# Altium PCB PICHeaderBoard.PcbDoc
Units mm, origin at the board's own origin, x right, y up, seen from the top; angles counter-clockwise.
Board outline 30.7 x 48.5 mm, 2 copper layers (Top Layer, Bottom Layer); 25 components, 44 nets, 141 pads, 39 vias.
Unrouted connection lines stored in the file: 2.
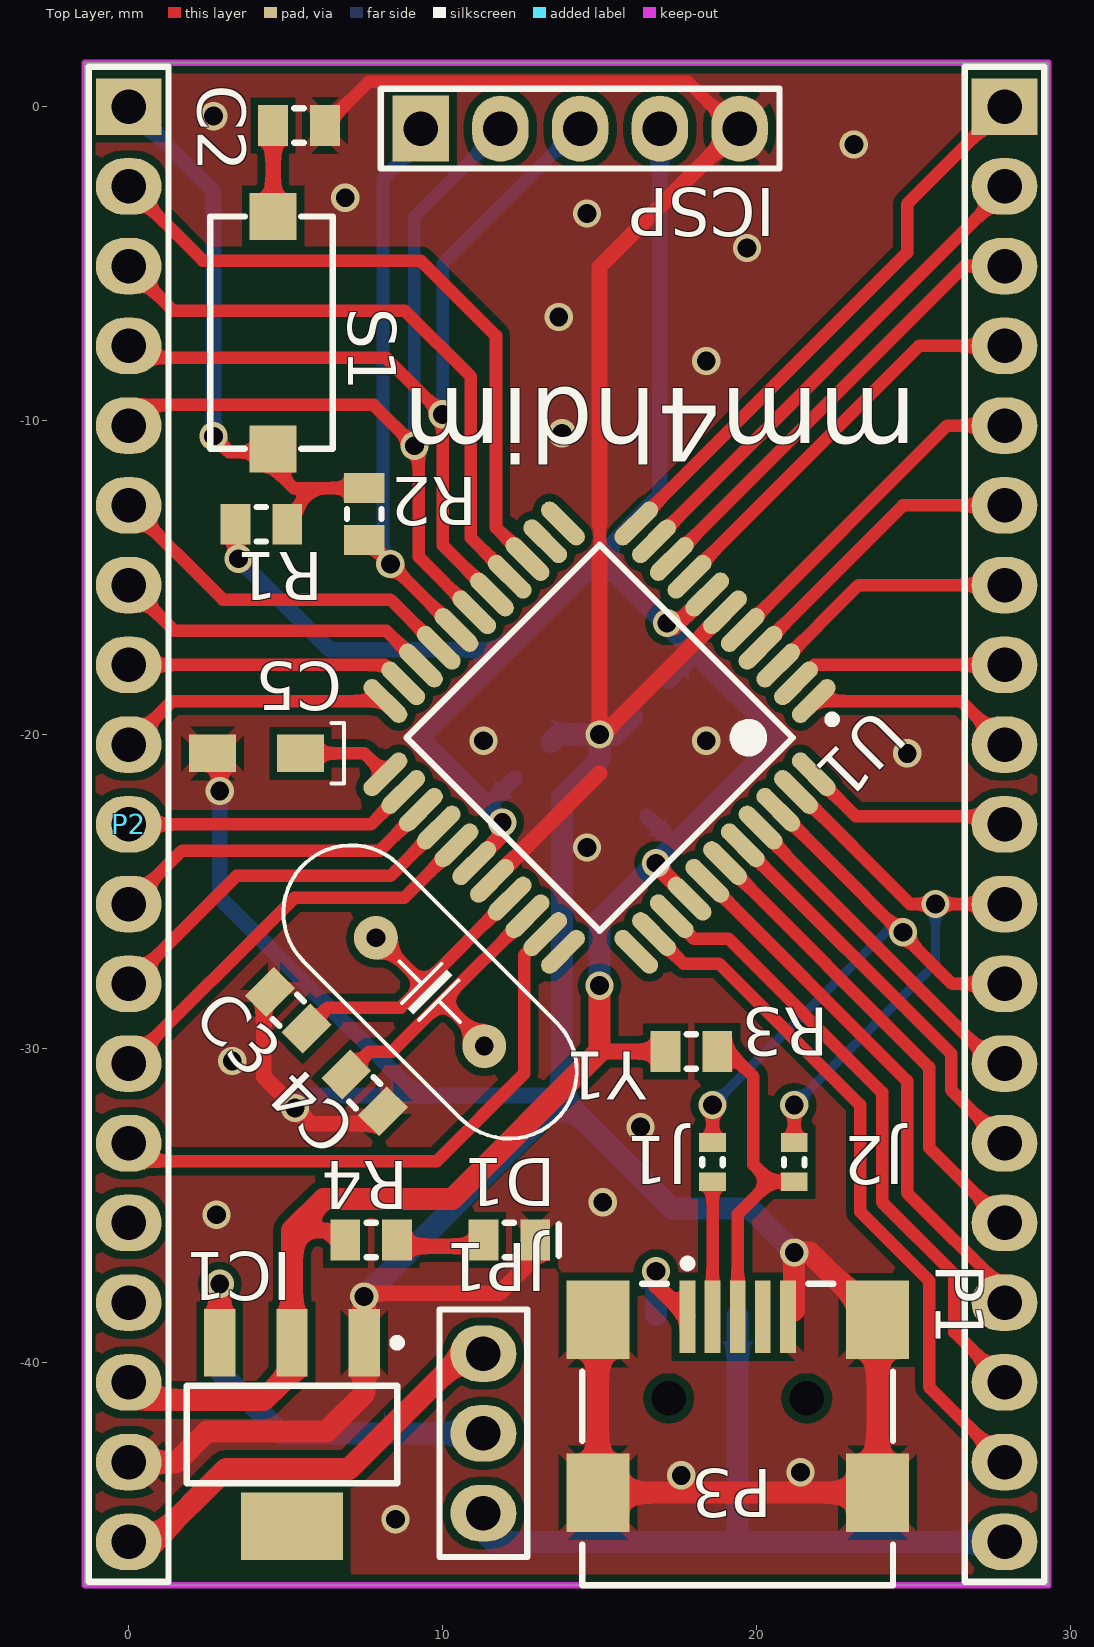
[diagram p0: Top Layer view]
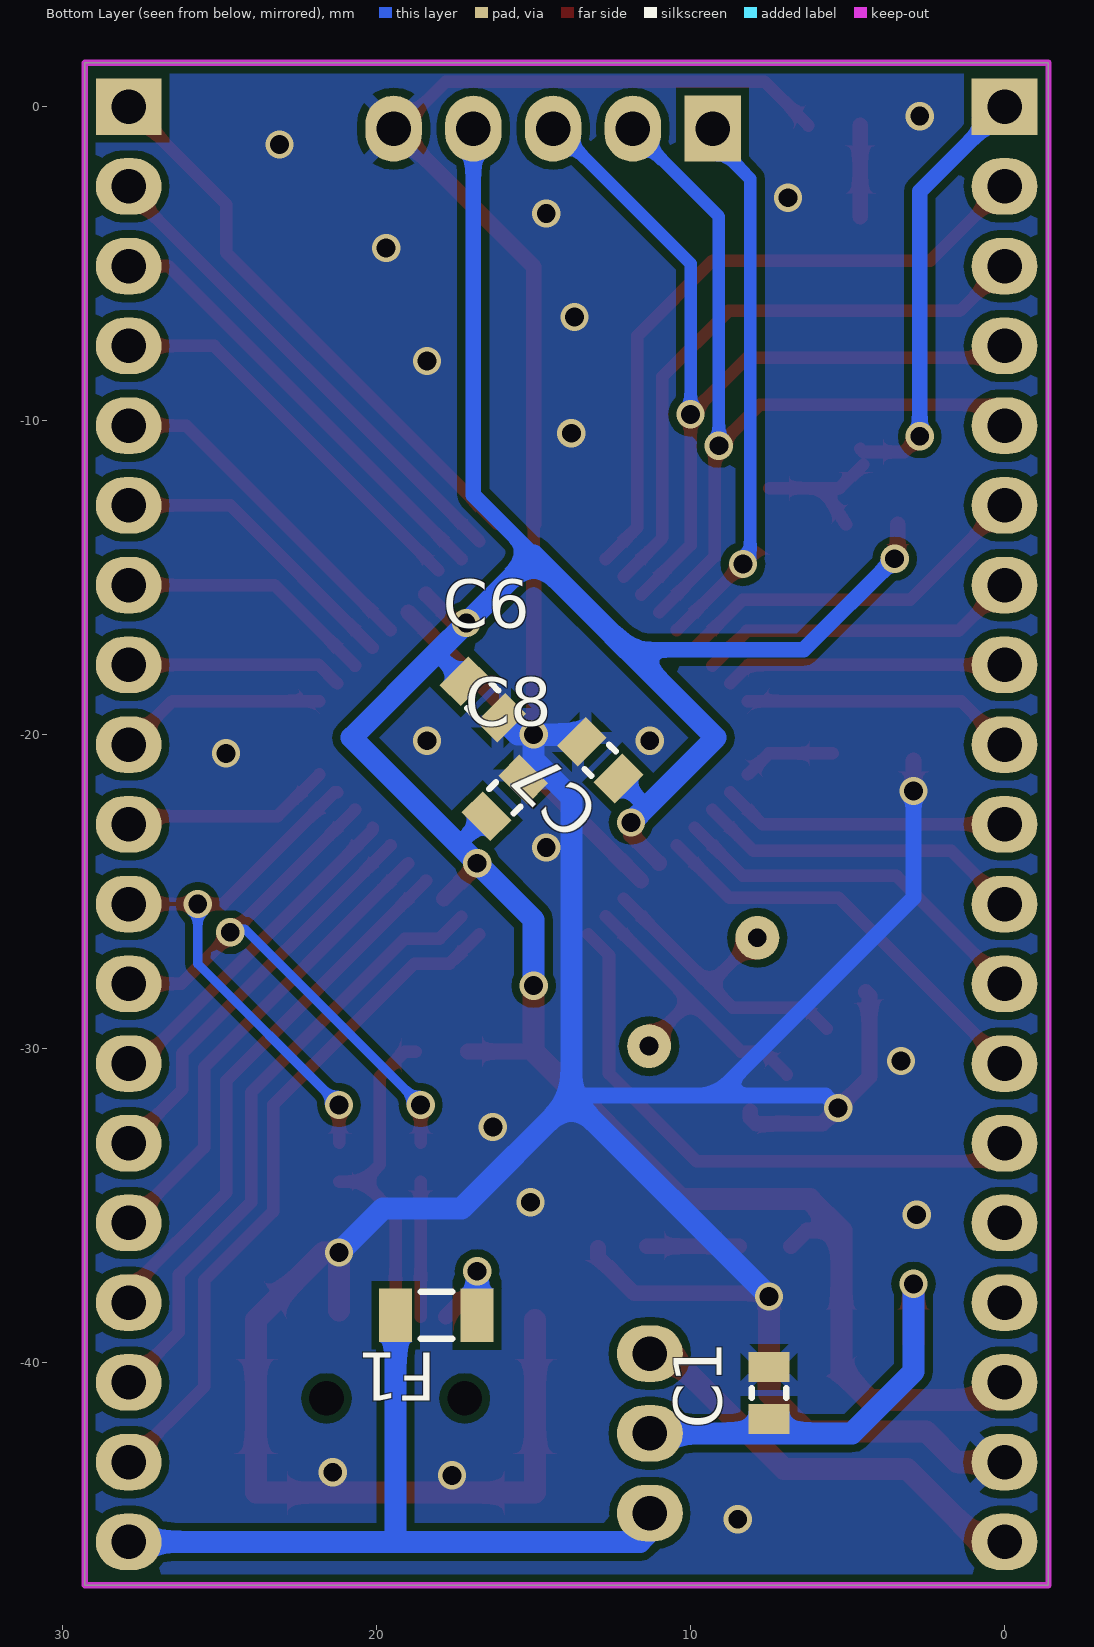
[diagram p1: Bottom Layer view, seen from below]
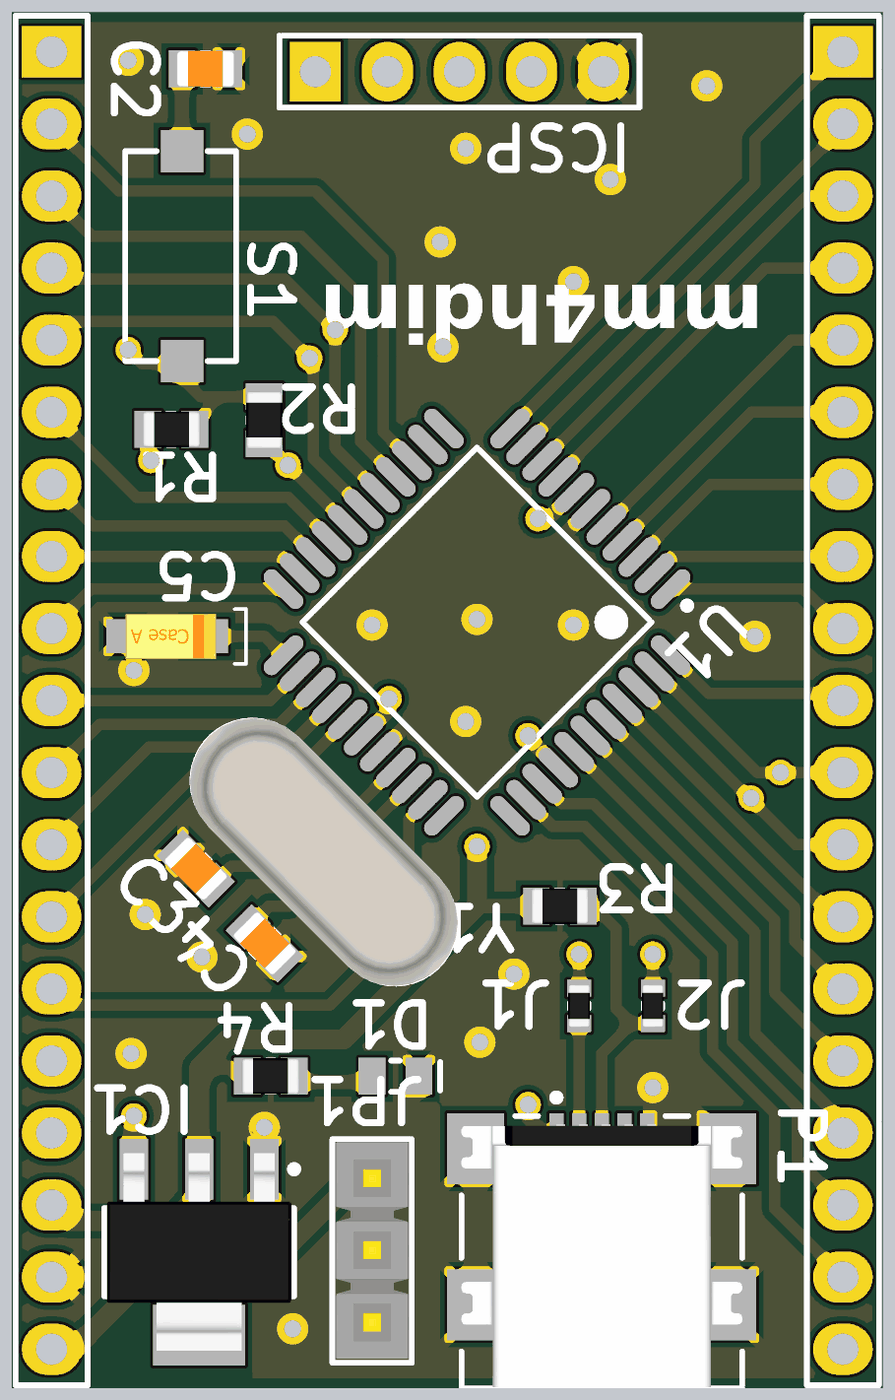
[diagram p2: 3D render of the assembled board from above, using the file's embedded part models]
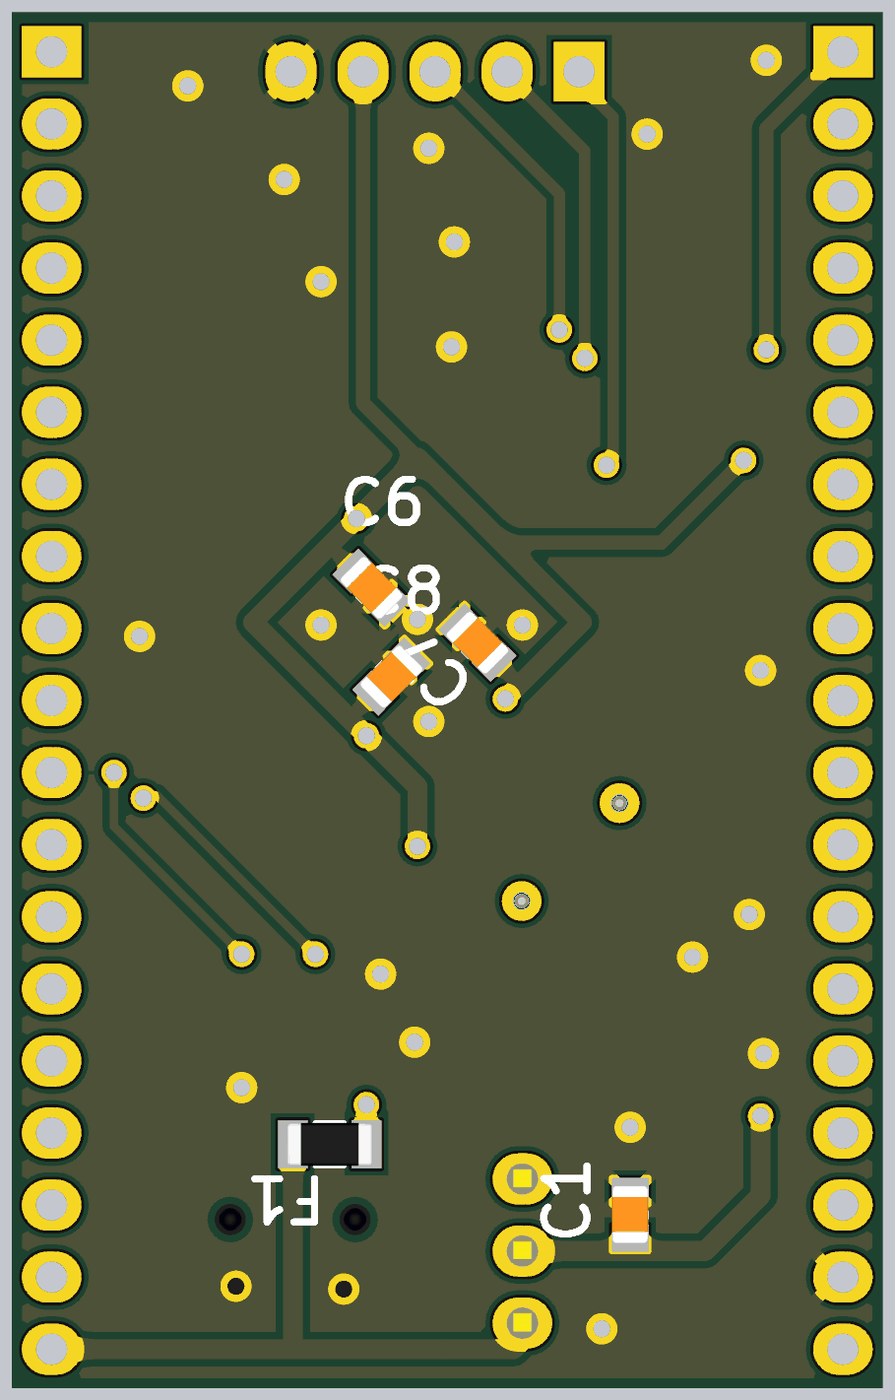
[diagram p3: 3D render of the assembled board from below, using the file's embedded part models]

## Layer stack, top to bottom
Top Solder: solder mask 0.0102, Solder Resist, Dk 3.5
Top Layer: signal copper 0.0356
Dielectric 1: dielectric 0.32, FR-4, Dk 4.8
Bottom Layer: signal copper 0.0356
Bottom Solder: solder mask 0.0102, Solder Resist, Dk 3.5

## Board outline
-1.4,-47.1 -1.4,1.4 29.3,1.4 29.3,-47.1

## Design rules (kind name [scope] priority, off if disabled: settings)
Clearance [All] p1: gap=0.25
ComponentClearance [All] p1: gap=0.2 collisioncheckmode=3 verticalgap=0.2 showdistances=FALSE
PlaneConnect [All] p1: planeconnectstyle=Relief reliefexpansion=0.508 reliefentries=4 reliefconductorwidth=1 reliefairgap=0.254
PolygonConnect PolygonConnect_1 [IsVia] p1: connectstyle=Direct reliefconductorwidth=0.254 reliefentries=4 polygonreliefangle="90 Angle" airgapwidth=0.254
PolygonConnect [All] p2: connectstyle=Relief reliefconductorwidth=0.4 reliefentries=4 polygonreliefangle="45 Angle" airgapwidth=0.25
RoutingVias [All] p1: holewidth=0.6 width=0.9 viastyle="Through Hole" minholewidth=0.5 minwidth=0.6 maxholewidth=0.711 maxwidth=1
SolderMaskExpansion [All] p1: expansion=0.102
Width [All] p1: maxlimit=1 minlimit=0.3 preferedwidth=0.7 minimp=50.000000 maximp=50.000000 favimp=50.000000
28 further rules are at their usual default settings.

## Components (designator, comment, footprint, x,y, rotation, side; value= is the part's Value field where it differs from the comment)
C1 "100nF" SMD_CAP_0805 7.5,-41.8 r90 bottom
C2 "100nF" SMD_CAP_0805 4.6,-0.6 r0 top
C3 "18pF" SMD_CAP_0805 4.5,-28.2 r315 top
C4 "18pF" SMD_CAP_0805 8.1,-32 r135 top
C5 "10uF" "TANTAL-CAP-Size A" 4.2,-20.6 r180 top
C6 "100nF" SMD_CAP_0805 17.2,-18.3 r225 bottom
C7 "100nF" SMD_CAP_0805 12.3,-21.4 r45 bottom
C8 "100nF" SMD_CAP_0805 16.5,-22.6 r135 bottom
D1 "LED" LED 12.1,-36.1 r270 top
F1 "500mA" SMD_RES_1206 16.8,-38.5 r0 bottom
IC1 "AMS1117" SOT223 5.2,-42.3 r180 top
ICSP "Header 5" HDR1X5 9.3,-0.7 r0 top
J1 "JUMPER" SMD_RES_0603 18.6,-33 r270 top
J2 "JEMPER" SMD_RES_0603 21.2,-33 r270 top
JP1 "Jumper Selector" "Jumper Selector" 11.3,-44.8 r90 top
P1 "USB mini" USB/SM0.8-6H5 19.4,-46.4 r270 top
P2 "Header 19" HDR1X19 0,0 r270 top
P3 "Header 19" HDR1X19 27.9,0 r270 top
R1 "10K" SMD_RES_0805 3.4,-13.3 r0 top
R2 "470" SMD_RES_0805 7.5,-13.8 r90 top
R3 "1.5K" SMD_RES_0805 17.1,-30.1 r0 top
R4 "470" SMD_RES_0805 6.9,-36.1 r0 top
S1 "Small Switch" "SMALL SWITCH" 4.6,-7.5 r90 top
U1 "PIC18F46J50-I/PT" TQFP-PT44_N 15,-20.1 r225 top
Y1 "16 MHz" "XTAL Small" 9.6,-28.2 r135 top

## Footprints (in the part's own frame and the unit in brackets; to place one, negate y for a bottom-side part, rotate by r counter-clockwise, add the part's x,y. Pads: shape width x height; smd on the part's side, far side on the other; paste and mask are expansions set on the pad)
HDR1X5 [mm] "Connector; Header; 5 Position"
  rect 1.8x2.1 hole 1.1: 1(0,0)
  oval 1.8x2.1 hole 1.1: 2(2.54,0) 3(5.08,0) 4(7.62,0) 5(10.16,0)
  silkscreen extent -1.27,-1.27 11.43,1.27
HDR1X19 [mm] "Connector; Header; 19 Position"
  rect 1.8x2.1 hole 1.1: 1(0,0)
  oval 1.8x2.1 hole 1.1: 2(2.54,0) 3(5.08,0) 4(7.62,0) 5(10.16,0) 6(12.7,0) 7(15.24,0) 8(17.78,0) 9(20.32,0) 10(22.86,0) 11(25.4,0) 12(27.94,0) 13(30.48,0) 14(33.02,0) 15(35.56,0) 16(38.1,0) 17(40.64,0) 18(43.18,0) 19(45.72,0)
  silkscreen extent -1.27,-1.27 46.99,1.27
"Jumper Selector" [mm]
  oval 1.8x2.1 hole 1.1: 1(0,0) 2(2.54,0) 3(5.08,0)
  silkscreen extent -1.4,-1.4 6.48,1.4, body extent -1.24,-1.27 6.38,1.27, height 10.16
LED [mm]
  rect 1.3x0.95 smd: 1(0,-0.8) 2(0,0.85)
  silkscreen extent -0.55,-0.12 0.55,1.6
"SMALL SWITCH" [mm]
  rect 1.5x1.5 smd: 1(-3.4,0) 2(4,0)
  silkscreen extent -3.4,-1.9 4,2
SMD_CAP_0805 [mm]
  rect 0.95x1.3 smd: 1(0,0) 2(1.65,0)
  silkscreen extent 0.67,-0.55 0.97,0.55, body extent -0.19,-0.64 1.84,0.63, height 0.65
SMD_RES_0603 [mm] "Chip Resistor, 2-Leads, Body 1.6x0.8mm, IPC High Density _ (0.063W)"
  rect 0.6x0.85 smd: 1(0,0) 2(1.244,0)
  silkscreen extent 0.52,-0.33 0.72,0.33, body extent -0.14,-0.38 1.38,0.38, height 0.45
SMD_RES_0805 [mm] "Chip Resistor, 2-Leads, Body 2.0x1.3mm, IPC High Density _ (0.100 W)"
  rect 0.95x1.3 smd: 1(0,0) 2(1.65,0)
  silkscreen extent 0.67,-0.55 0.97,0.55, body extent -0.19,-0.63 1.84,0.64, height 0.6
SMD_RES_1206 [mm] "Chip Resistor, 2-Leads, Body 3.2x1.6mm, IPC High Density _ (0.125 W)"
  rect 1.05x1.7 smd: 1(0,0) 2(2.596,0)
  silkscreen extent 0.8,-0.75 1.8,0.75, body extent -0.23,-0.76 2.82,0.76, height 0.6
SOT223 [mm] "SOT223, 4-Leads, Body 6.50x7.00mm (avg), Pitch 2.30mm, IPC Medium Density"
  rect 1x2.15 smd: 1(-2.3,-2.925) 2(0,-2.925) 3(2.3,-2.925)
  rect 3.25x2.15 smd: 4(0,2.925)
  silkscreen extent -3.48,-3.05 3.35,1.55, body extent -3.25,-3.48 3.25,3.48, height 1.66
"TANTAL-CAP-Size A" [mm] "Chip Capacitor, 2-Leads, Body 3.2x1.6mm, IPC High Density, chip Tantalum"
  rect 1.5x1.199 smd: 1(1.53,0) 2(-1.27,0)
  silkscreen extent -2.65,-0.97 -2.26,0.97, body extent -1.6,-0.8 1.6,0.8, height 1.6
TQFP-PT44_N [mm] "Thin QFP, 44-Leads, Body 10x10mm, Pitch 0.8mm, IPC Medium Density"
  oval 1.75x0.55 smd: 1(-5.65,4) 2(-5.65,3.2) 3(-5.65,2.4) 4(-5.65,1.6) 5(-5.65,0.8) 6(-5.65,0) 7(-5.65,-0.8) 8(-5.65,-1.6) 9(-5.65,-2.4) 10(-5.65,-3.2) 11(-5.65,-4) 23(5.65,-4) 24(5.65,-3.2) 25(5.65,-2.4) 26(5.65,-1.6) 27(5.65,-0.8) 28(5.65,0) 29(5.65,0.8) 30(5.65,1.6) 31(5.65,2.4) 32(5.65,3.2) 33(5.65,4)
  oval 0.55x1.75 smd: 12(-4,-5.65) 13(-3.2,-5.65) 14(-2.4,-5.65) 15(-1.6,-5.65) 16(-0.8,-5.65) 17(0,-5.65) 18(0.8,-5.65) 19(1.6,-5.65) 20(2.4,-5.65) 21(3.2,-5.65) 22(4,-5.65) 34(4,5.65) 35(3.2,5.65) 36(2.4,5.65) 37(1.6,5.65) 38(0.8,5.65) 39(0,5.65) 40(-0.8,5.65) 41(-1.6,5.65) 42(-2.4,5.65) 43(-3.2,5.65) 44(-4,5.65)
  silkscreen extent -5.77,-4.35 4.35,4.95, body extent -5,-5 5,5, height 1.2
USB/SM0.8-6H5 [mm] "Connector; USB2.0, Type B, SM; 5 Position; Right Angle"
  rect 2.3x0.5 smd: 1(-7.85,-1.6) 2(-7.85,-0.8) 3(-7.85,0) 4(-7.85,0.8) 5(-7.85,1.6)
  rect 2.5x2 smd: 6(-7.75,4.45) 7(-2.25,4.45) 8(-7.75,-4.45) 9(-2.25,-4.45)
  round 0.6 hole 1.1 unplated: MH1(-5.25,2.2) MH2(-5.25,-2.2)
  silkscreen extent -9.67,-4.95 0.7,4.95, body extent -8.6,-4.95 0.65,4.95, height 3.93
"XTAL Small" [mm]
  round 1.397 hole 0.6: 1(-2.44,0) 2(2.44,0)
  silkscreen extent -5.71,-2.16 5.71,2.16, body extent -5.75,-2.25 5.75,2.25, height 3.56

## Part data
C1 C2 C3 C4 C6 C7 C8: library part Cap-Bipolar, "Bipolar Capacitor"
C5: library part "Capacitor Electrolytic", "Electrolytic Capacitor"
F1: library part Fuse, "Fuse"
ICSP: "Header, 5-Pin"
J1 J2 R1 R2 R3 R4: library part Resistor, "Resistor"
P1: "mini USB Connector"
P2 P3: "Header, 19-Pin"
U1: "Low Power, High Performance USB Microcontroller with nanoWatt XLP Technology, 44-pin TQFP, Industrial Temperature"
Y1: library part XTAL, "XTAL Crystal"

## Via types
v1: diameter 0.9, hole 0.6, Top Layer to Bottom Layer, 39 vias

## Nets (pads, with @x,y where several pads share a name; then routed paths per layer and width w, separated by ;. In a path a pad name is that pad's centre, name@x,y a point inside that pad or via, vN(x,y) a via of type N, cw(c..) or ccw(c..) an arc to the next point about the centre after c; other vN are vias at no path point)
3V3: C6.1 C7.1 C8.1 IC1.2 ICSP.4 P2.17 R1.1 R3.1 R4.1 U1.7 U1.28 U1.37 | length 91.2
  Top Layer w0.5: R1.1 3.4,-14.3 v1(3.5,-14.4) ; 5.2,-35.8 6.3,-35.8 R4.1@6.8,-36.3 ; U1.28 11.9,-23.2 v1(11.9,-22.8) ; 15,-30.1 R3.1 ; v1@16.8,-24.163 U1.37 ; v1@17.369,-16.6 U1.7
  Top Layer w0.7: P2.17@0.56,-41.2 4.3,-41.2 5.2,-40.3 IC1.2 5.2,-35.8 6.2,-34.8 10.3,-34.8 15,-30.1 v1(15,-28)
  Bottom Layer w0.5: v1(3.5,-14.4) 6.4,-17.3 12,-17.3 ; 11.3,-22.2 11.5,-22.2 C7.1 ; 15,-14.3 16.92,-12.38 ICSP.4@16.92,-1.5 ; C8.1 17.4,-23.5 ; C6.1 18.1,-17.4
  Bottom Layer w0.7: v1(11.9,-22.8) 11.3,-22.2 9.2,-20.1 12,-17.3 15,-14.3 v1(17.15,-16.45) 18.1,-17.4 20.8,-20.1 17.4,-23.5 v1(16.8,-24.1) 15,-25.9 v1(15,-28)
D+: J2.1 J2.2 P1.3 P3.11 R3.2 U1.43 | length 28.5
  Top Layer w0.4: R3.2 19.1,-30.1 19.9,-30.9 19.9,-33.7 20.444,-34.244 ; P1.3@19.4,-39.05 P1.3 19.4,-35.289 20.444,-34.244 ; J2.2 20.444,-34.244 ; J2.1 v1(21.2,-31.8) ; U1.43 21.329,-21.832 24.896,-25.4 ; 25,-25.4 v1(25.7,-25.4) P3.11
  Bottom Layer w0.3: v1(21.2,-31.8) 25.7,-27.3 v1(25.7,-25.4)
D-: J1.1 J1.2 P1.2 P3.12 U1.42 | length 23.4
  Top Layer w0.4: P1.2 J1.2 ; J1.1 v1(18.6,-31.8) ; U1.42 26.234,-27.94 P3.12
  Bottom Layer w0.3: v1(18.6,-31.8) 24.2,-26.2 24.565,-26.2 v1(24.665,-26.3)
MCLR: ICSP.1 R2.1 U1.18 | length 17.3
  Top Layer w0.4: R2.1@7.969,-14.2 v1(8.334,-14.566) U1.18
  Bottom Layer w0.4: v1(8.334,-14.566) 8.1,-14.331 8.1,-2.3 ICSP.1@9.1,-1.3
NetC1_1: C1.1 IC1.3 JP1.2 | length 13.3
  Top Layer w0.7: IC1.3 v1(2.9,-37.5)
  Bottom Layer w0.7: v1(2.9,-37.5) 2.9,-40.3 4.86,-42.26 JP1.2@10.7,-42.26
NetC2_1: C2.1 S1.2 | length 2.9
  Top Layer w0.5: S1.2 C2.1
NetD1_1: D1.1 R4.2 | length 3
  Top Layer w0.5: R4.2@8.45,-36.3 D1.1@11.4,-36.3
NetF1_1: F1.1 P1.1 | length 3.3
  Top Layer w0.5: v1(16.8,-37.1) 16.8,-37.55 P1.1
  Bottom Layer w0.7: F1.1 v1(16.8,-37.1)
OSC1: C3.2 U1.30 Y1.2 | length 10.3
  Top Layer w0.4: C3.2 6.333,-28.7 8.663,-28.7 9.4,-27.963 ; Y1.2 7.912,-26.475 9.4,-27.963 ; U1.30 9.4,-27.963
OSC2: C4.2 U1.31 Y1.1 | length 9.8
  Top Layer w0.4: C4.2 7.667,-30.1 8.394,-30.1 10,-28.494 ; Y1.1 11.325,-29.819 10,-28.494 ; U1.31 10,-28.494
RA0: P2.6 U1.19 | length 11.8
  Top Layer w0.4: P2.6 3,-15.7 8.337,-15.7 U1.19
RA1: P2.7 U1.20 | length 10.4
  Top Layer w0.4: P2.7 1.46,-16.7 8.206,-16.7 U1.20
RA2: P2.8 U1.21 | length 9
  Top Layer w0.4: P2.8 8.155,-17.78 U1.21
RA3: P2.9 U1.22 | length 8.8
  Top Layer w0.4: P2.9 1.387,-18.933 U1.22
RA5: P2.10 U1.24 | length 9.2
  Top Layer w0.4: P2.10 7.715,-22.86 U1.24
RB0: P3.4 U1.8 | length 12.8
  Top Layer w0.4: U1.8@18.041,-14.759 25.18,-7.62 P3.4
RB1: P3.3 U1.9 | length 14.5
  Top Layer w0.4: U1.9 26.626,-5.08 P3.3
RB2: P3.2 U1.10 | length 15.8
  Top Layer w0.4: U1.10 P3.2@27.9,-2.675
RB3: P3.1 U1.11 | length 18.1
  Top Layer w0.4: U1.11 24.8,-4.643 24.8,-3.1 P3.1
RB4: P2.2 U1.14 | length 21.2
  Top Layer w0.4: P2.2 2.36,-4.9 9.3,-4.9 11.7,-7.3 11.7,-13.406 U1.14
RB5: P2.3 U1.15 | length 19.2
  Top Layer w0.4: P2.3 1.42,-6.5 8.8,-6.5 10.9,-8.6 10.9,-13.737 U1.15
RB6: ICSP.3 P2.4 U1.16 | length 27.7
  Top Layer w0.4: P2.4 0.38,-8 8.2,-8 v1(10,-9.8) 10,-13.969 U1.16
  Bottom Layer w0.4: v1(10,-9.8) 10,-5 ICSP.3@13.94,-1.06
RB7: ICSP.2 P2.5 U1.17 | length 25.7
  Top Layer w0.4: P2.5@0.66,-9.5 7.8,-9.5 v1(9.1,-10.8) 9.234,-10.934 9.234,-14.334 U1.17
  Bottom Layer w0.4: v1(9.1,-10.8) 9.1,-3.5 ICSP.2@11.47,-1.13
RC0: P2.14 U1.32 | length 18.4
  Top Layer w0.4: P2.14@0.075,-33.596 9.804,-33.596 12.6,-30.8 12.6,-27.025 U1.32
RC1: P3.18 U1.35 | length 22.1
  Top Layer w0.4: U1.35 17.675,-27.3 18.8,-27.3 23.3,-31.8 23.3,-35.2 25.5,-37.4 25.5,-40.78 P3.18
RC2: P3.17 U1.36 | length 19.9
  Top Layer w0.4: U1.36@17.3,-25.8 18,-26.5 19.1,-26.5 24,-31.4 24,-34.9 26.3,-37.2 26.3,-39.04 P3.17
RC6: P3.10 U1.44 | length 6.7
  Top Layer w0.4: U1.44 23.157,-22.6 27.64,-22.6 P3.10
RC7: P3.9 U1.1 | length 6.7
  Top Layer w0.4: U1.1 26.513,-18.933 P3.9
RD0: P3.16 U1.38 | length 17.4
  Top Layer w0.4: U1.38 24.8,-31.031 24.8,-34.6 27.9,-37.7 P3.16
RD1: P3.15 U1.39 | length 15.2
  Top Layer w0.4: U1.39 25.5,-30.6 25.5,-33.16 P3.15
RD2: P3.14 U1.40 | length 12.9
  Top Layer w0.4: U1.40 26.2,-30.169 26.2,-31.32 P3.14
RD3: P3.13 U1.41 | length 10.7
  Top Layer w0.4: U1.41 20.127,-23.035 27.572,-30.48 P3.13@27.643,-30.48
RD4: P3.8 U1.2 | length 6.9
  Top Layer w0.4: U1.2 21.845,-17.78 P3.8
RD5: P3.7 U1.3 | length 8.3
  Top Layer w0.4: U1.3 23.254,-15.24 P3.7
RD6: P3.6 U1.4 | length 9.7
  Top Layer w0.4: U1.4 24.663,-12.7 P3.6
RD7: P3.5 U1.5 | length 11
  Top Layer w0.4: U1.5 26.071,-10.16 P3.5
RE0: P2.11 U1.25 | length 10.6
  Top Layer w0.4: P2.11 1.7,-23.7 8.006,-23.7 U1.25
RE1: P2.12 U1.26 | length 11.9
  Top Layer w0.4: P2.12 3.44,-24.5 8.337,-24.5 U1.26
RE2: P2.13 U1.27 | length 13.3
  Top Layer w0.4: P2.13 5.28,-25.2 8.769,-25.2 U1.27
RTS: P2.1 R1.2 R2.2 S1.1 | length 18.5
  Top Layer w0.4: v1(2.7,-10.5) 3.2,-11 4.5,-11 S1.1 ; S1.1@4.5,-11.4 5.25,-12.15 5.8,-12.15 ; R1.2 5.8,-12.15 ; R2.2 5.8,-12.15
  Bottom Layer w0.5: P2.1 2.7,-2.7 v1(2.7,-10.5)
VBUS: F1.2 JP1.1 P3.19 | length 24.8
  Bottom Layer w0.7: JP1.1@10.7,-44.8 11.62,-45.72 P3.19 ; 19.396,-45.716 F1.2
VCAP: C5.2 U1.23 | length 3
  Top Layer w0.4: C5.2 7.51,-20.6 U1.23
VIN: JP1.3 P2.19 | length 13.2
  Top Layer w0.7: P2.19 0.78,-45.72 3.1,-43.4 7.02,-43.4 JP1.3@10.7,-39.72
VSS: C1.2 C2.2 C3.1 C4.1 C5.1 C6.2 C7.2 C8.2 D1.2 IC1.1 ICSP.5 P1.5 P1.6 P1.7 P1.8 P1.9 P2.18 U1.6 U1.29 | length 151.5
  Top Layer w0.4: C2.2 7.65,0.8 17.8,0.8 ICSP.5@19.35,-0.75 ; 15,-14.2 15,-13.3
  Top Layer w0.5: v1(2.9,-21.8) C5.1@2.9,-20.83 ; C3.1@4.421,-28.2 4.3,-28.321 4.3,-30.9 5.8,-32.4 7.9,-32.4 8.1,-32.2 C4.1 ; v1(7.5,-37.9) 7.6,-37.8 11.8,-37.8 12.95,-36.65 D1.2@12.95,-36.35 ; U1.29 15,-21.231 ; v1(15,-20) 15,-14.2 ; 15,-13.3 15,-5.1 ICSP.5@19.35,-0.75 ; v1@15.05,-20.05 U1.6
  Top Layer w0.7: P2.18 1.52,-43.18 2.5,-42.2 6.3,-42.2 7.5,-41 IC1.1 v1(7.5,-37.9) ; P1.8 P1.9 P1.7 P1.6 21.7,-36.5 v1(21.2,-36.5) P1.5@21.2,-38.35
  Bottom Layer w0.5: v1(2.9,-21.8) 2.9,-25.2 9.2,-31.5 ; v1(5.3,-31.9) 5.7,-31.5 9.2,-31.5 ; 13.7,-31.5 9.2,-31.5
  Bottom Layer w0.7: v1(7.5,-37.9) 13.8,-31.6 ; C7.2 13.7,-20 v1(15,-20) ; C6.2 15.5,-20 v1(15,-20) ; v1(21.2,-36.5) 19.8,-35.1 17.3,-35.1 13.8,-31.6 ; 13.8,-31.6 13.8,-22 15,-20.8 v1(15,-20)
  other v1: 8.5,-45 17.6,-43.6 21.4,-43.5 2.8,-35.3 15.1,-34.9 16.3,-32.5 3.3,-30.4 14.6,-23.6 24.8,-20.6 11.3,-20.2 18.4,-20.2 13.8,-10.4 18.4,-8.1 13.7,-6.7 19.7,-4.5 14.6,-3.4 6.9,-2.9 23.1,-1.2 2.7,-0.3
pads on no net: IC1.4 P1.4 P1.MH1 P1.MH2 P2.15 P2.16 U1.12 U1.13 U1.33 U1.34

## Polygon pours and split planes (outlines as drawn)
VSS on Bottom Layer "VSS_L02_P000" (solid, remove dead copper, pour order 0): -1.283,1.234 -1.183,1.334 -1.083,1.234 29.317,1.234 29.317,-47.266 29.217,-47.166 -1.283,-47.166
VSS on Top Layer "VSS_L01_P004" (solid, remove dead copper, pour order 4): -1.383,1.268 -1.283,1.368 29.217,1.368 29.317,1.268 29.317,-47.132 -1.283,-47.132 -1.383,-47.032

## Keep-outs
Keep-Out Layer:
  the board outline again, w0.2

## Other copper
Top Layer:
  pour cut-out: 20.359,-33.975 20.359,-33.225 21.875,-33.225 21.875,-33.975
  pour cut-out: 17.925,-34.069 17.925,-33.3 19.1,-33.3 19.1,-34.069

## Silkscreen, mask and mechanical layers (free items; w line width, h text height)
Top Overlay:
  text "mm4hdim" at 25.1,-8.2 h4 r180

## Text inside footprints (layer, text, board x,y; h text height)
P1: Mechanical 1 "PCB Edge" at 15.364,-46.832 h0.25